# Altium PCB Adapter.PcbDoc
Units mm, origin at the board's own origin, x right, y up, seen from the top; angles counter-clockwise.
Board outline 152.4 x 101.6 mm, 2 copper layers (Top Layer, Bottom Layer); 2 components, 20 nets, 40 pads, 0 vias.
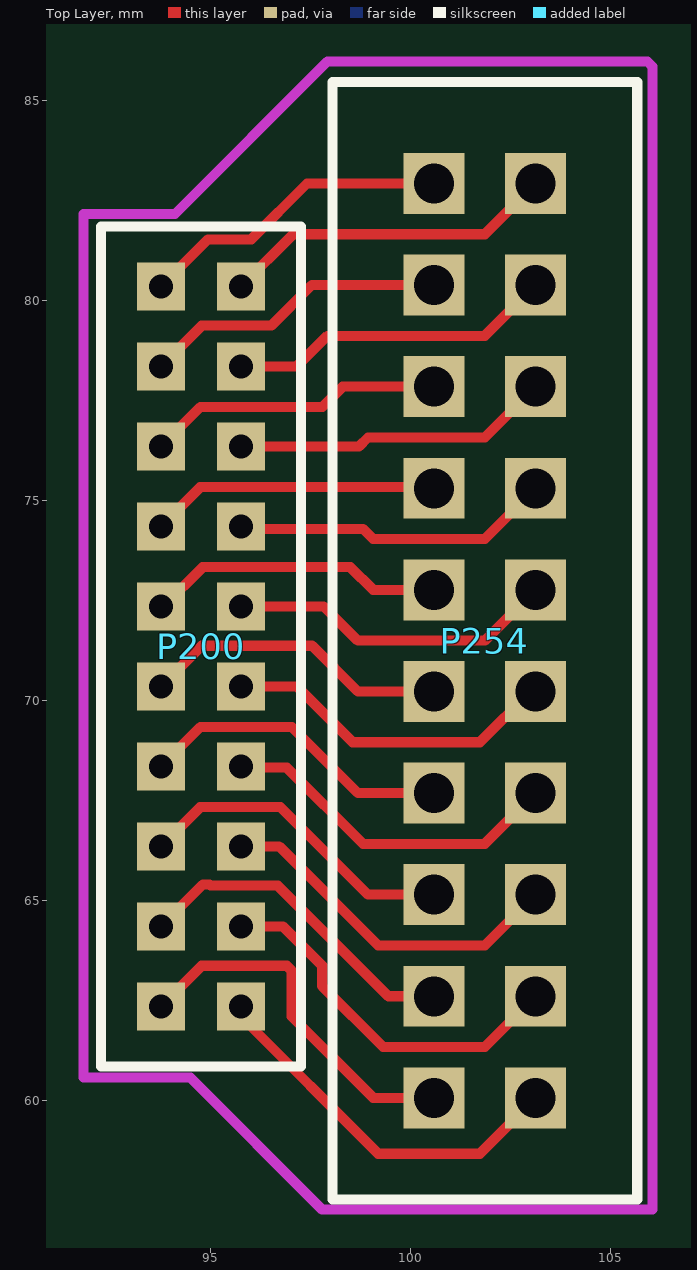
[diagram p0: Top Layer view]
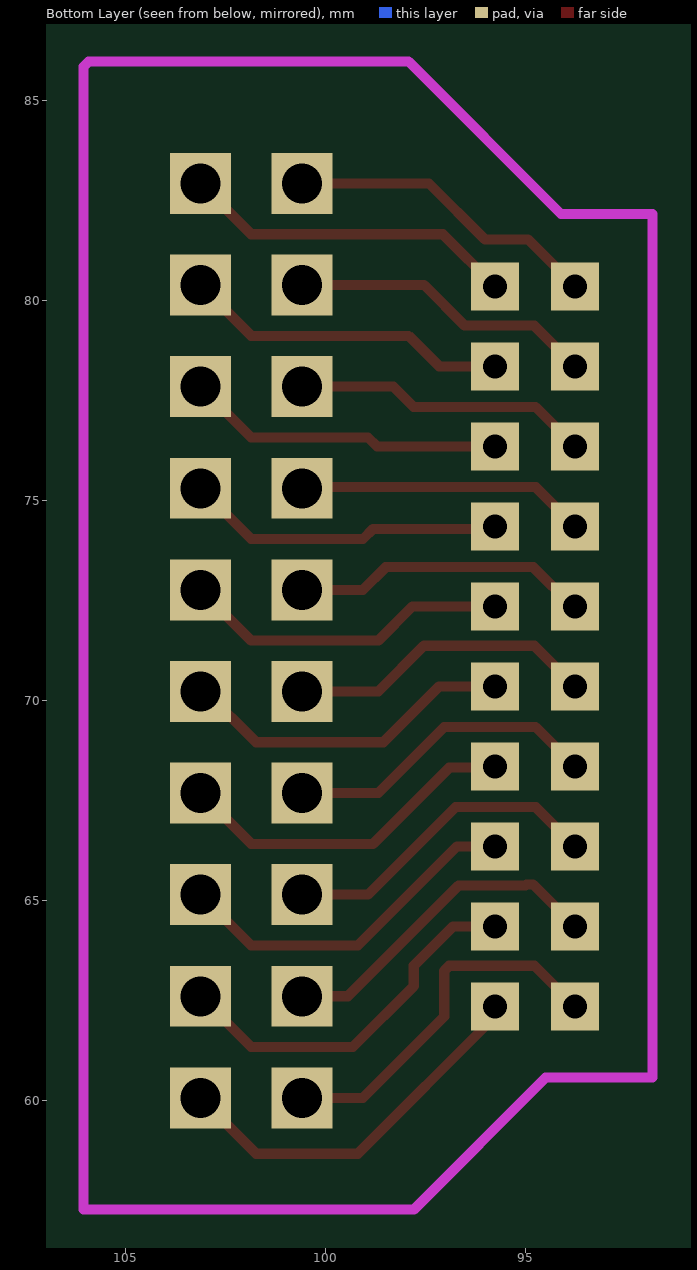
[diagram p1: Bottom Layer view, seen from below]

## Layer stack, top to bottom
Top Solder: solder mask 0.0102, Solder Resist, Dk 3.5
Top Layer: signal copper 0.0356
Dielectric 1: dielectric 0.32, FR-4, Dk 4.8
Bottom Layer: signal copper 0.0356
Bottom Solder: solder mask 0.0102, Solder Resist, Dk 3.5

## Board outline
25.4,25.4 177.8,25.4 177.8,127 25.4,127

## Design rules (kind name [scope] priority, off if disabled: settings)
Clearance [All] p1: gap=0.254
PolygonConnect [All] p1: connectstyle=Relief reliefconductorwidth=0.254 reliefentries=4 polygonreliefangle="90 Angle" airgapwidth=0.254
RoutingVias [All] p1: holewidth=0.711 width=1.27 viastyle="Through Hole" minholewidth=0.711 minwidth=1.27 maxholewidth=0.711 maxwidth=1.27
SolderMaskExpansion [All] p1: expansion=0.102
UnpouredPolygon [All] p1: allowunpoured=FALSE
Width [All] p1: maxlimit=0.254 minlimit=0.254 preferedwidth=0.254
29 further rules are at their usual default settings.

## Components (designator, comment, footprint, x,y, rotation, side; value= is the part's Value field where it differs from the comment)
P200 "Header 20pin" "Header 2.00 2x10" 95.758,70.358 r90 top
P254 "Header 20pin" "Header 2.54 2x10 rect pads" 105.664,82.931 r90 top

## Footprints (in the part's own frame and the unit in brackets; to place one, negate y for a bottom-side part, rotate by r counter-clockwise, add the part's x,y. Pads: shape width x height; smd on the part's side, far side on the other; paste and mask are expansions set on the pad)
"Header 2.00 2x10" [mm]
  rect 1.2x1.2 hole 0.6: 1(10,2) 2(10,0) 3(8,2) 4(8,0) 5(6,2) 6(6,0) 7(4,2) 8(4,0) 9(2,2) 10(2,0) 11(0,2) 12(0,0) 13(-2,2) 14(-2,0) 15(-4,2) 16(-4,0) 17(-6,2) 18(-6,0) 19(-8,2) 20(-8,0)
  silkscreen extent -9.5,-1.5 11.5,3.5
"Header 2.54 2x10 rect pads" [mil]
  rect 60x60 hole 39.37: 1(0,200) 2(0,100) 3(-100,200) 4(-100,100) 5(-200,200) 6(-200,100) 7(-300,200) 8(-300,100) 9(-400,200) 10(-400,100) 11(-500,200) 12(-500,100) 13(-600,200) 14(-600,100) 15(-700,200) 16(-700,100) 17(-800,200) 18(-800,100) 19(-900,200) 20(-900,100)
  silkscreen extent -1000,0 100,300

## Nets (pads, with @x,y where several pads share a name; then routed paths per layer and width w, separated by ;. In a path a pad name is that pad's centre, name@x,y a point inside that pad or via, vN(x,y) a via of type N, cw(c..) or ccw(c..) an arc to the next point about the centre after c; other vN are vias at no path point)
NetP200_1: P200.1 P254.1 | length 8.2
  Top Layer w0.254: P200.1@93.758,80.677 P200.1 94.934,81.534 96.012,81.534 97.409,82.931 P254.1
NetP200_2: P200.2 P254.2 | length 8.4
  Top Layer w0.254: P200.2 97.061,81.661 101.854,81.661 P254.2
NetP200_3: P200.3 P254.3 | length 7.7
  Top Layer w0.254: P200.3 94.777,79.377 96.516,79.377 97.53,80.391 P254.3
NetP200_4: P200.4 P254.4 | length 8.2
  Top Layer w0.254: P200.4 97.154,78.358 97.917,79.121 101.854,79.121 P254.4
NetP200_5: P200.5 P254.5 | length 7.4
  Top Layer w0.254: P200.5@93.758,76.359 94.742,77.343 97.79,77.343 98.298,77.851 P254.5
NetP200_6: P200.6 P254.6 | length 8
  Top Layer w0.254: P200.6 98.71,76.358 98.933,76.581 101.854,76.581 P254.6
NetP200_7: P200.7 P254.7 | length 7.3
  Top Layer w0.254: P200.7 94.739,75.339 100.584,75.339 P254.7
NetP200_8: P200.8 P254.8 | length 8
  Top Layer w0.254: P200.8 95.821,74.295 98.806,74.295 99.06,74.041 101.854,74.041 P254.8
NetP200_9: P200.9 P254.9 | length 7.5
  Top Layer w0.254: P200.9 93.821,72.358 94.802,73.339 98.492,73.339 99.06,72.771 P254.9
NetP200_10: P200.10 P254.10 | length 8.2
  Top Layer w0.254: P200.10 97.822,72.358 98.679,71.501 101.854,71.501 P254.10
NetP200_11: P200.11 P254.11 | length 7.7
  Top Layer w0.254: P200.11 94.774,71.374 97.536,71.374 98.679,70.231 P254.11
NetP200_12: P200.12 P254.12 | length 8.5
  Top Layer w0.254: P200.12 97.155,70.358 98.552,68.961 101.727,68.961 102.997,70.231 P254.12
NetP200_13: P200.13 P254.13 | length 7.9
  Top Layer w0.254: P200.13 94.742,69.342 97.028,69.342 98.679,67.691 P254.13
NetP200_14: P200.14 P254.14 | length 8.7
  Top Layer w0.254: P200.14 95.79,68.326 96.901,68.326 98.806,66.421 101.854,66.421 P254.14
NetP200_15: P200.15 P254.15 | length 8.1
  Top Layer w0.254: P200.15 94.739,67.339 96.745,67.339 98.933,65.151 P254.15
NetP200_16: P200.16 P254.16 | length 8.9
  Top Layer w0.254: P200.16 96.71,66.358 99.187,63.881 101.854,63.881 P254.16
NetP200_17: P200.17 P254.17 | length 8.4
  Top Layer w0.254: P200.17 94.805,65.405 94.972,65.405 95,65.377 96.675,65.377 99.441,62.611 P254.17
NetP200_18: P200.18 P254.18 | length 9.4
  Top Layer w0.254: P200.18 96.805,64.358 97.79,63.373 97.79,62.865 99.314,61.341 101.854,61.341 P254.18
NetP200_19: P200.19 P254.19 | length 9.3
  Top Layer w0.254: P200.19 94.773,63.373 96.901,63.373 97.028,63.246 97.028,62.103 99.06,60.071 P254.19
NetP200_20: P200.20 P254.20 | length 9.6
  Top Layer w0.254: P200.20 95.758,62.103 99.187,58.674 101.727,58.674 P254.20

## Keep-outs
Keep-Out Layer:
  lines w0.254: 91.821,60.579 91.821,82.169 94.107,82.169 97.917,85.979 105.918,85.979 106.045,85.852 106.045,57.277 97.79,57.277 94.488,60.579 91.821,60.579